# EAGLE board test (EAGLE 9.5.2)
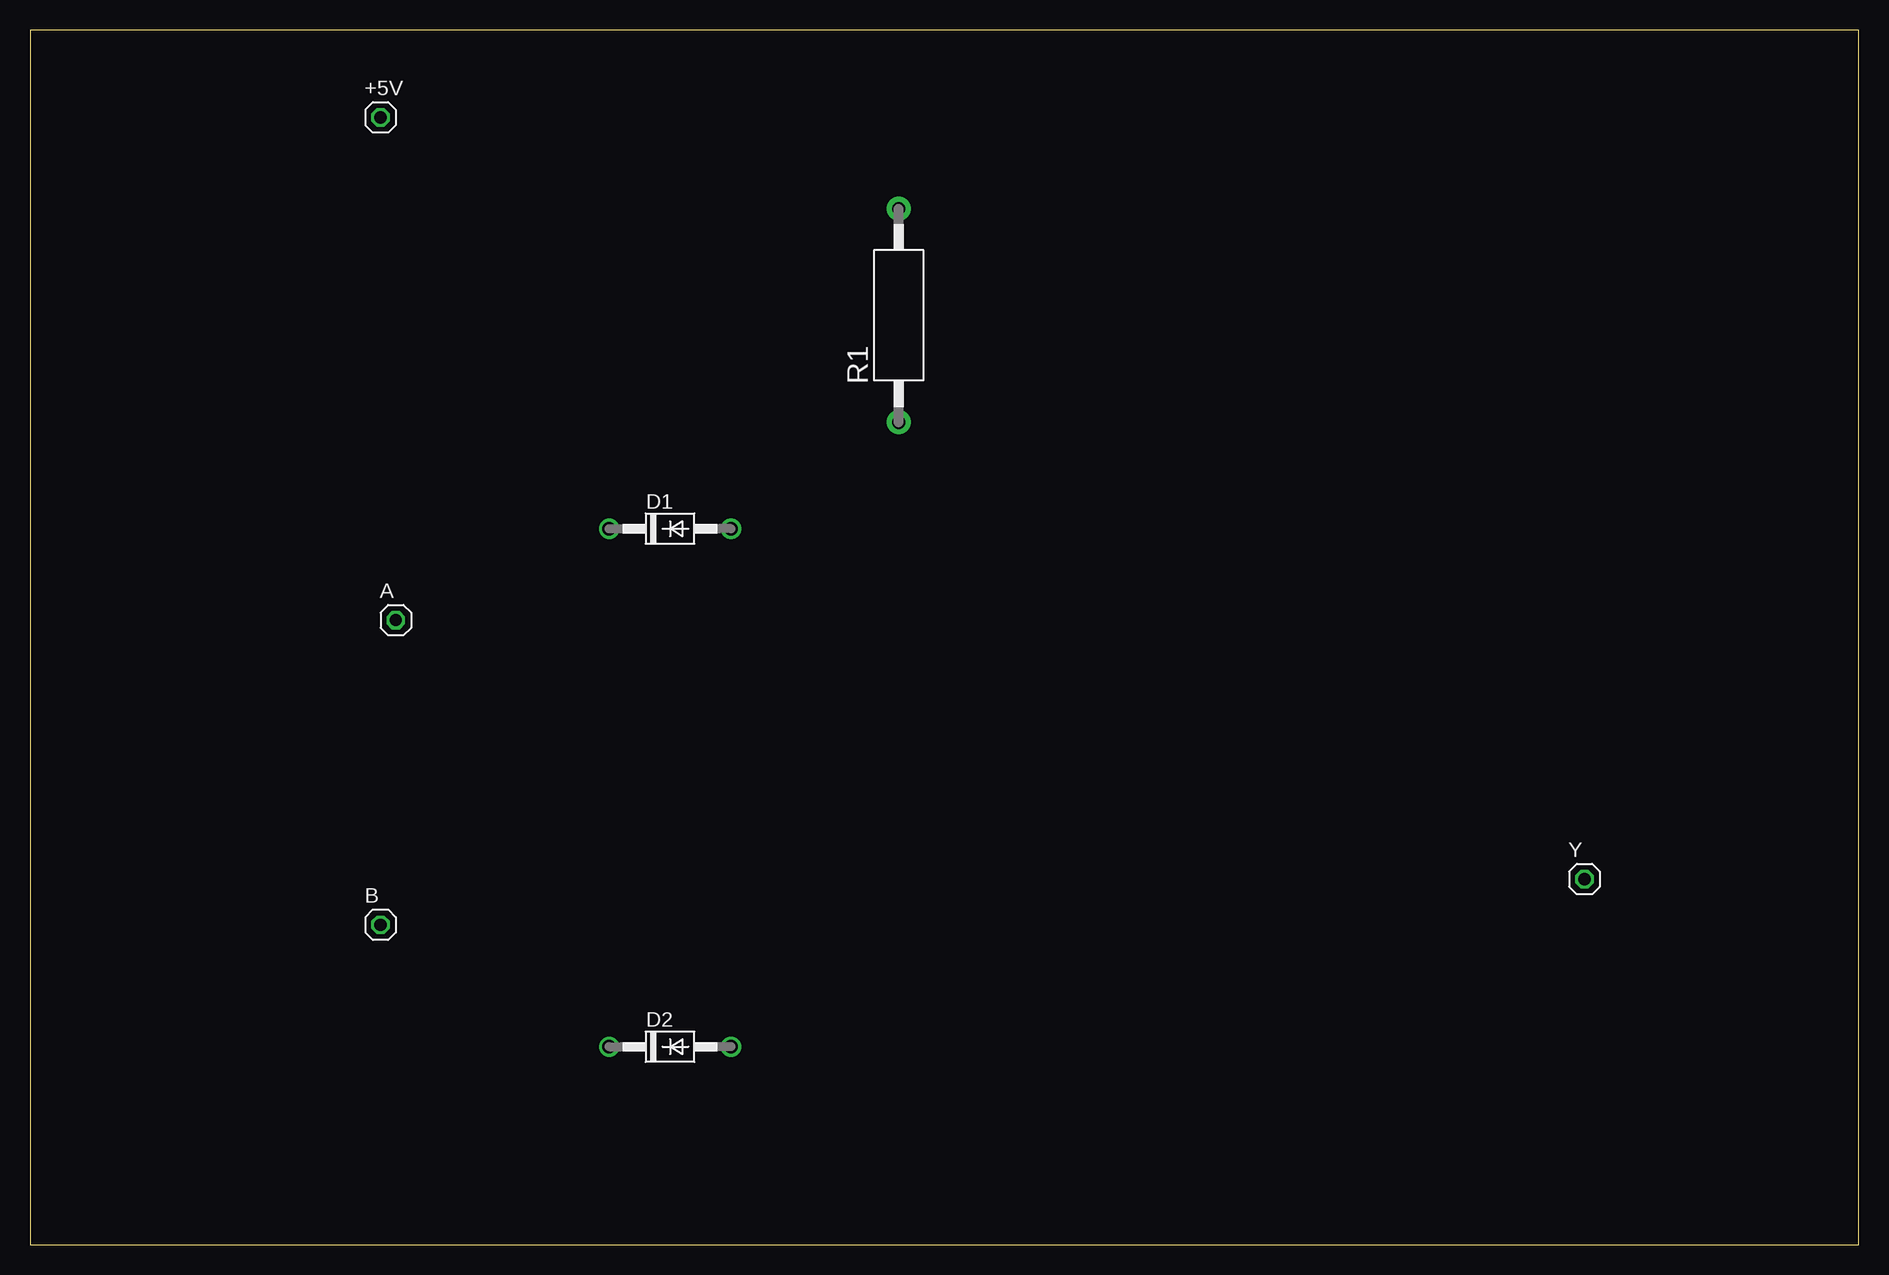
[diagram p0: board, top side]
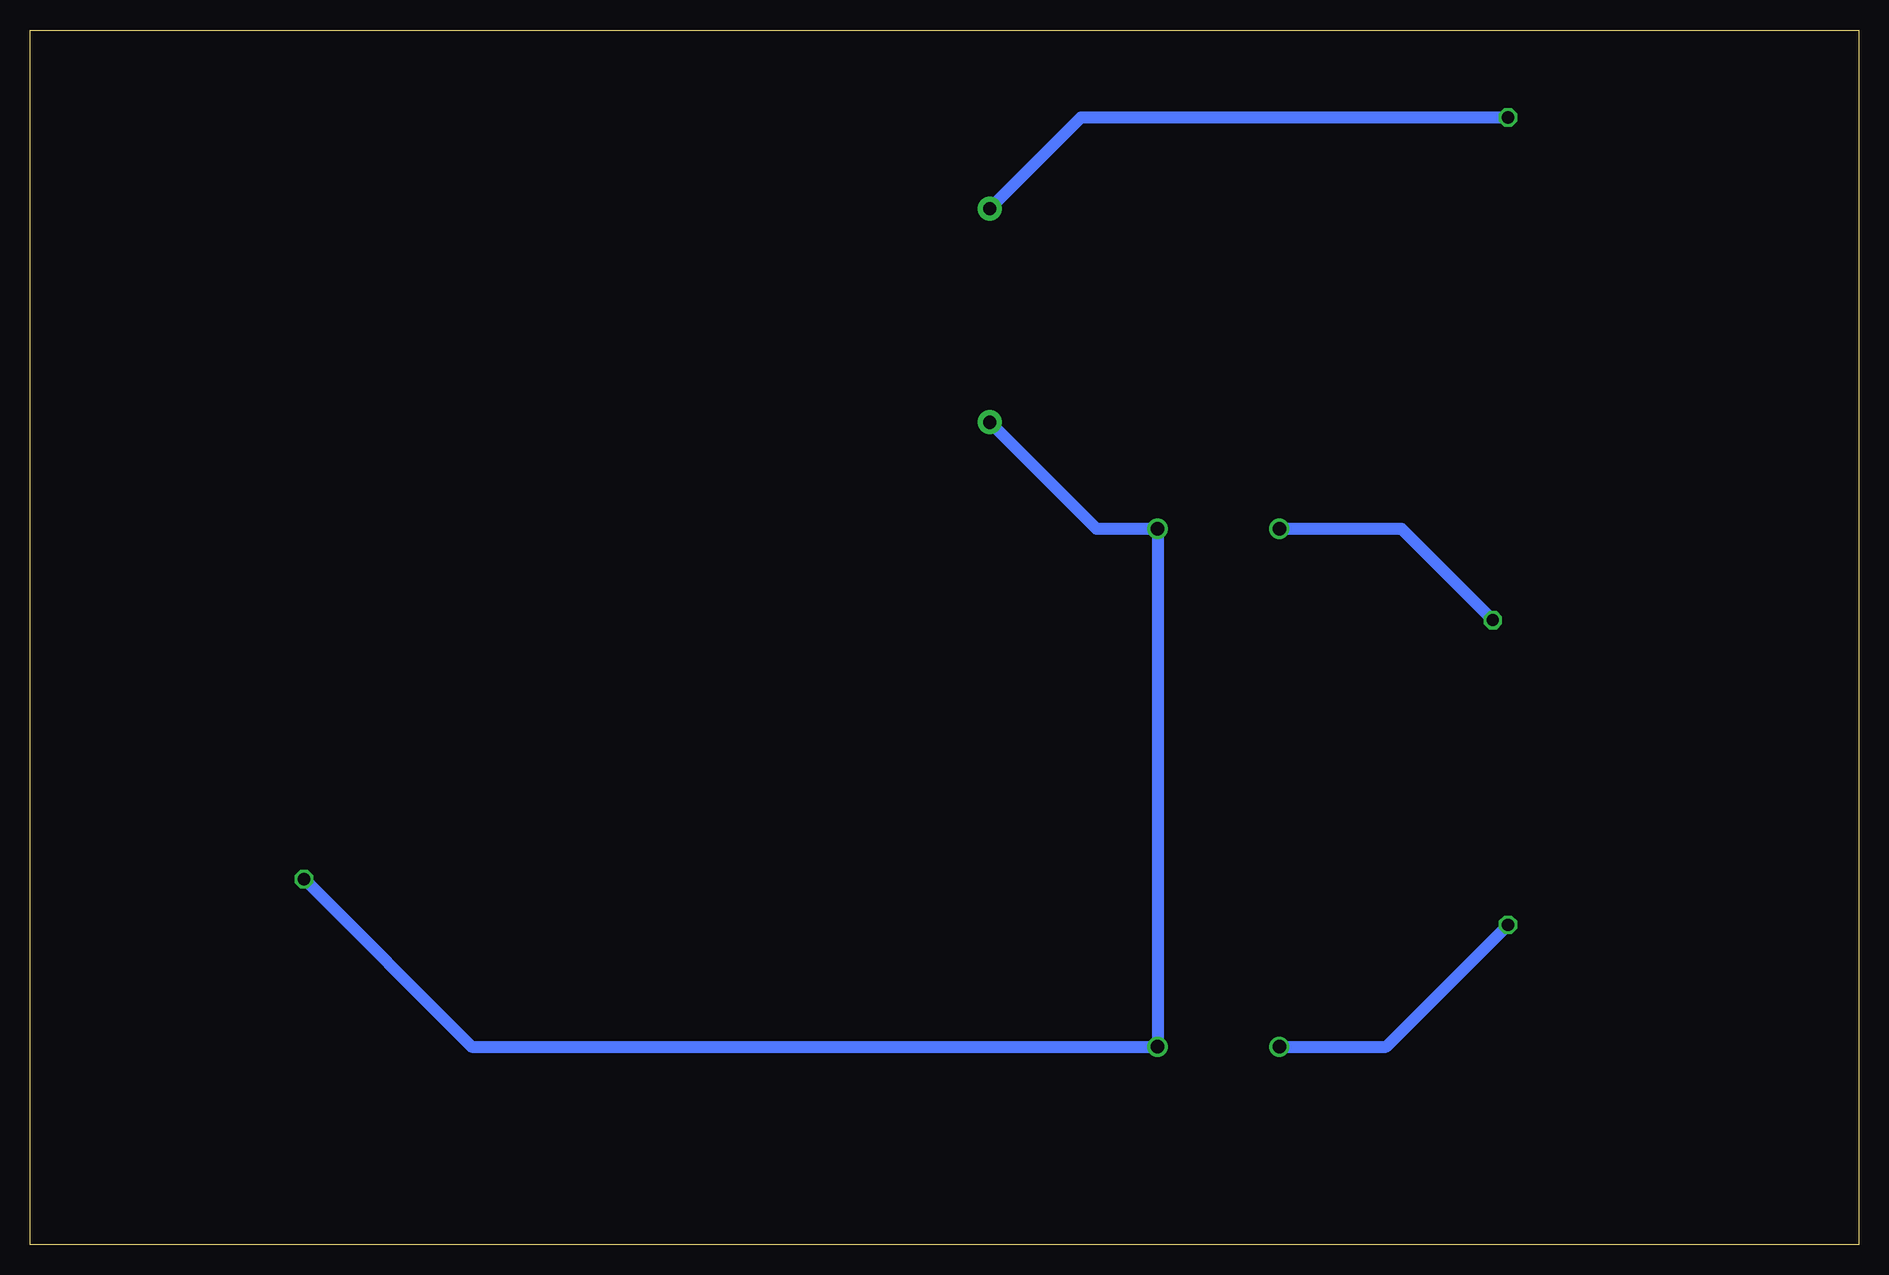
[diagram p1: board, bottom side, seen from below]

Size 152.38 x 101.27 mm. Coordinates in mm from the lower left corner, seen from the top.
Outline: 0,0 152.38,0 152.38,101.27 0,101.27 0,0
Copper layers (1*16): Top 0.035mm / dielectric 1.5mm / Bottom 0.035mm
Design rules "default": minimum track width 6mil, minimum drill 0.35mm, track to track 6mil, track to pad 6mil, pad to pad 6mil, via to via 6mil, smd to smd 6mil, copper to edge 40mil, drill to drill 6mil, minimum pad ring 10mil, minimum via ring 8mil, stop-mask expansion 4mil, vias tented up to drill 0mil, thermal gap 10mil

## Footprints (pad centres in the part's own frame; a part is rotated, then mirrored left to right if it is on the bottom)
1X01 = drill 1.016 octagon: 1 0,0
DO41-10 = drill 1.118: A 5.08,0; C -5.08,0
AC01 = drill 1.1 pad 2: 1 -8.9,0; 2 8.9,0

## Placement (x,y rotation side)
+5V  [1X01]  29.21,93.98 0 top
A  [1X01]  30.48,52.07 0 top
B  [1X01]  29.21,26.67 0 top
D1  1N4004  [DO41-10]  53.34,59.69 0 top
D2  1N4004  [DO41-10]  53.34,16.51 0 top
R1  [AC01]  72.39,77.47 90 top
Y  [1X01]  129.54,30.48 0 top

## Library data of the parts
+5V A B Y = pinhead
D1 D2 = diode
R1 = resistor-power; OC_FARNELL: unknown; OC_NEWARK: unknown

## Nets
N$1: +5V.1 R1.2
N$2: A.1 D1.C
N$3: B.1 D2.C
N$4: D1.A D2.A R1.1 Y.1

## Tracks (layer width: path | path; a pad name or v marks a point on that pad's centre or on a via)
N$1
  Bottom 1.016: R1.2 64.78,93.98 +5V.1
N$2
  Bottom 1.016: A.1 38.1,59.69 D1.C
N$3
  Bottom 1.016: D2.C 39.37,16.51 B.1
N$4
  Bottom 1.016: Y.1 115.57,16.51 D2.A D1.A 63.51,59.69 R1.1